# EAGLE board current_source (EAGLE 7.4.0)
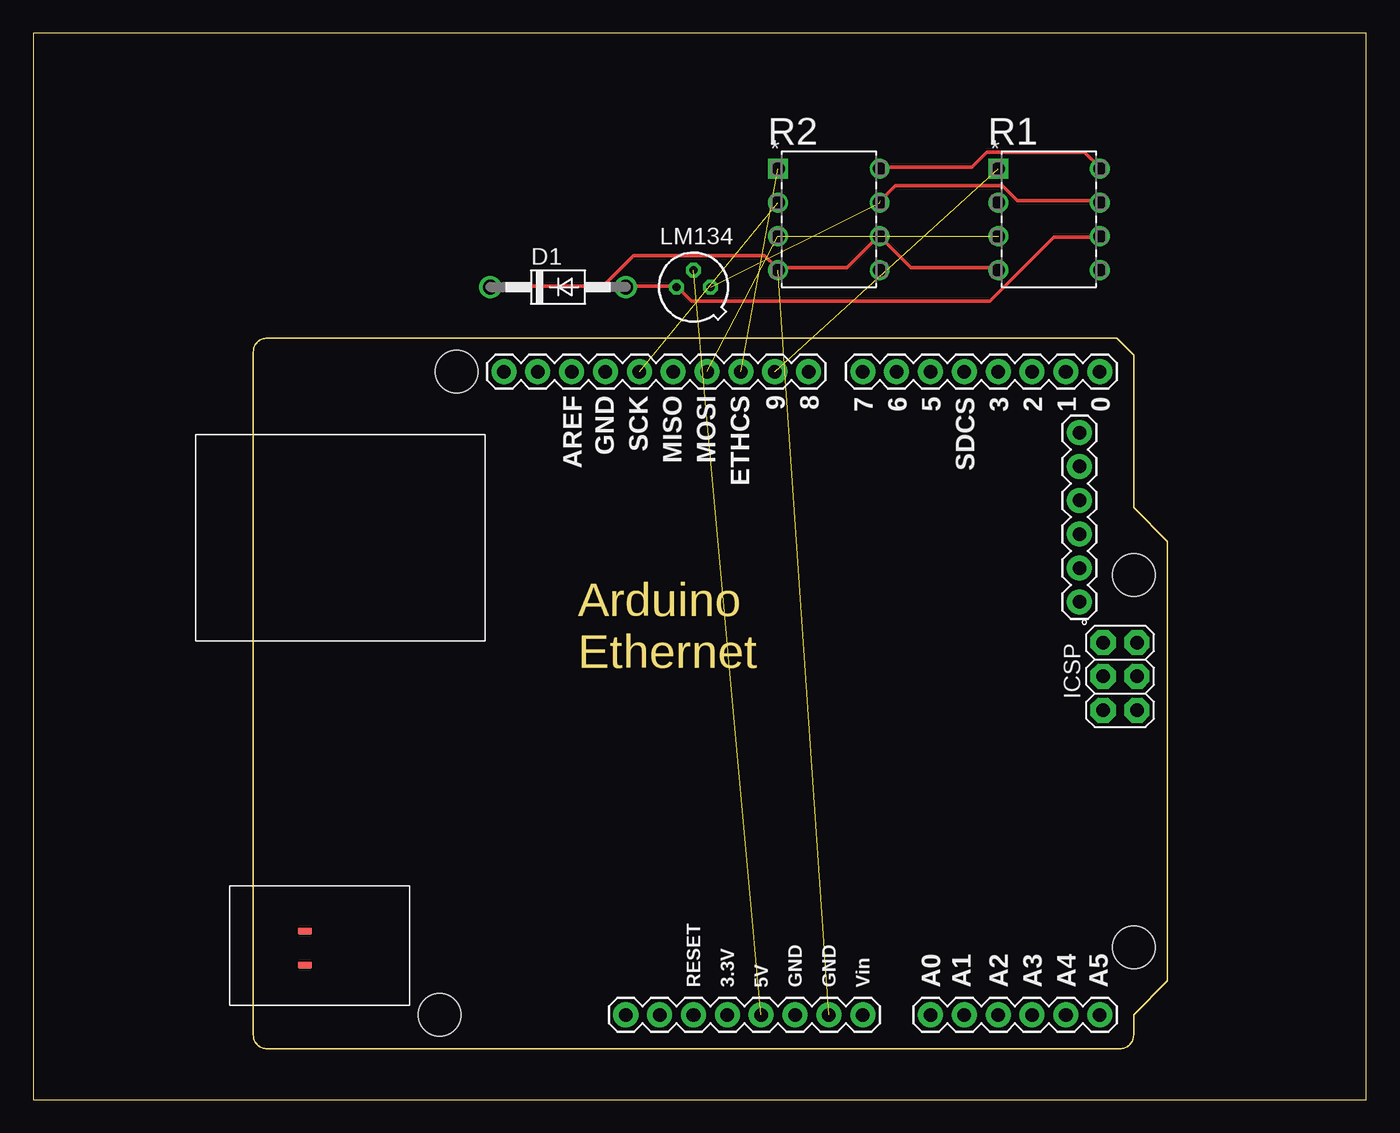
[diagram p0: board, top side]
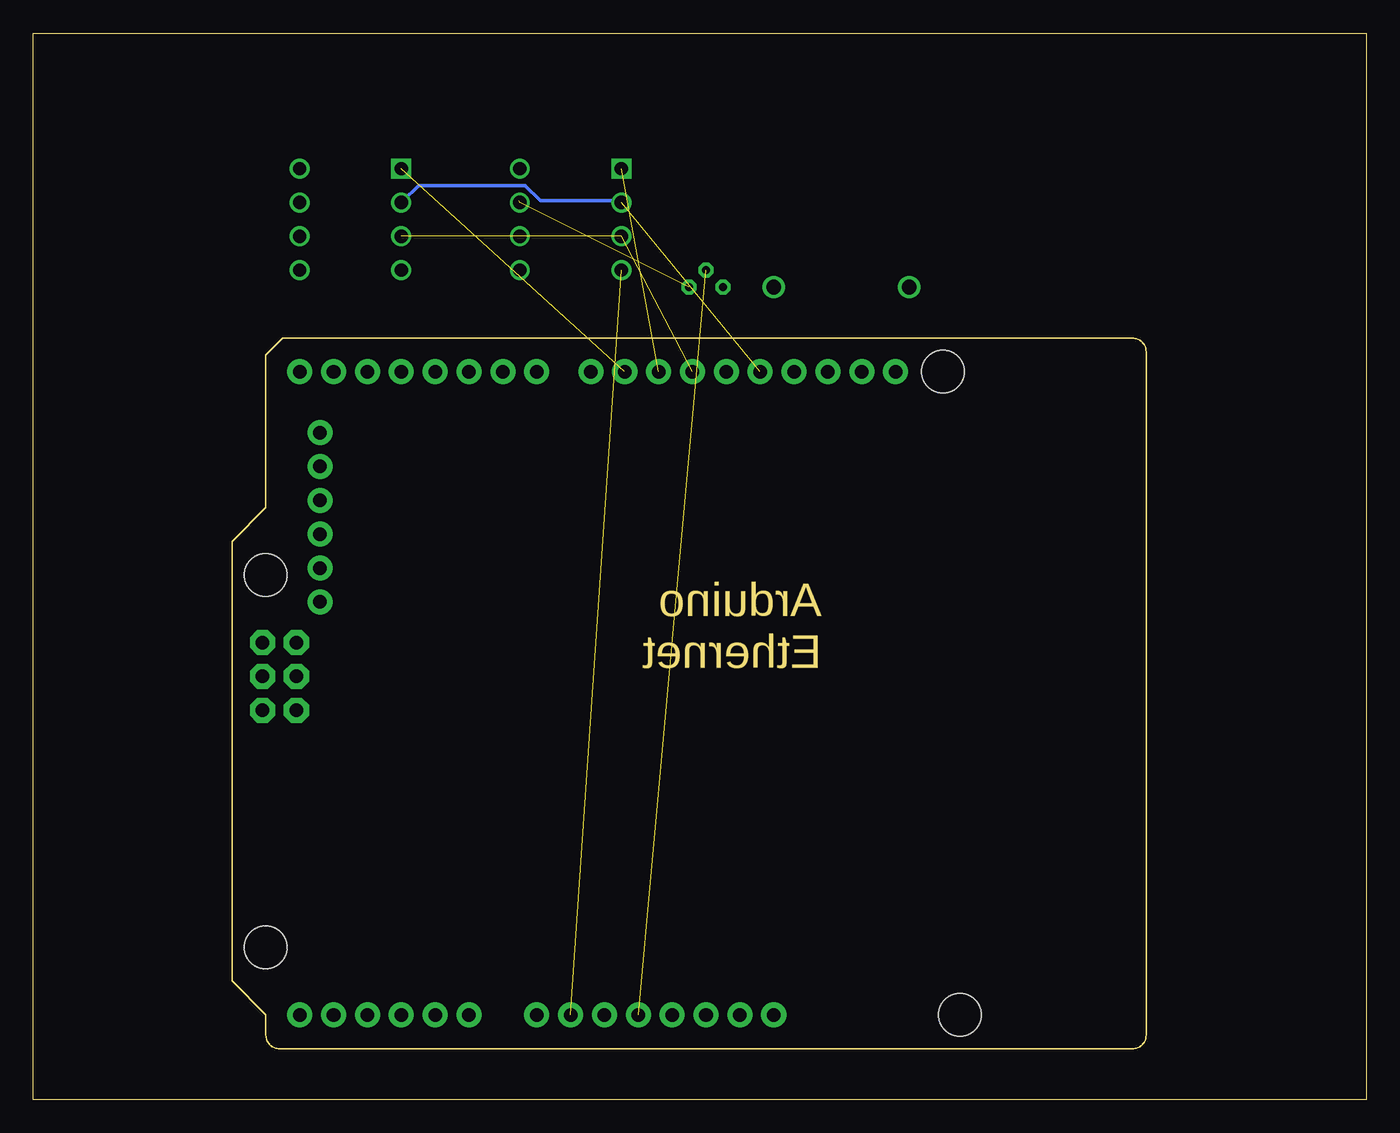
[diagram p1: board, bottom side, seen from below]

Size 100 x 80 mm. Coordinates in mm from the lower left corner, seen from the top.
Outline: 0,0 100,0 100,80 0,80 0,0
Copper layers (1*16): Top 0.035mm / dielectric 1.5mm / Bottom 0.035mm
Design rules "default": minimum track width 10mil, minimum drill 24mil, track to track 8mil, track to pad 8mil, pad to pad 8mil, via to via 8mil, smd to smd 8mil, copper to edge 40mil, drill to drill 8mil, minimum pad ring 10mil, minimum via ring 8mil, stop-mask expansion 4mil, vias tented up to drill 0mil, thermal gap 10mil

## Footprints (pad centres in the part's own frame; a part is rotated, then mirrored left to right if it is on the bottom)
DO41-10 = drill 1.118: A 5.08,0; C -5.08,0
TO46 = drill 0.61 octagon: 1 1.27,0; 2 0,1.27; 3 -1.27,0
ARDUINO_ETHERNET = drill 1.016 pad 1.88: 0 63.5,50.8; 1 60.96,50.8; 2 58.42,50.8; 3 55.88,50.8; 3.3V 35.56,2.54; 4 53.34,50.8; 5 50.8,50.8; 5V 38.1,2.54; 5V. 61.976,41.148; 6 48.26,50.8; 7 45.72,50.8; 8 41.656,50.8; 9 39.116,50.8; (N/C) 27.94,2.54; .GND 61.976,46.228; A0 50.8,2.54; A1 53.34,2.54; A2 55.88,2.54; A3 58.42,2.54; A4 60.96,2.54; A5 63.5,2.54; AREF 23.876,50.8; ETHCS 36.576,50.8; GND 26.416,50.8; GND. 43.18,2.54; GND.. 40.64,2.54; I/OREF 30.48,2.54; MISO 31.496,50.8; MOSI 34.036,50.8; N/C 61.976,43.688; PD0 61.976,38.608; PD1 61.976,36.068; RESET 33.02,2.54; RTS 61.976,33.528; SCK 28.956,50.8; SCL 18.796,50.8; SDA 21.336,50.8; VIN 45.72,2.54 | drill 1.016 pad 1.88 octagon: +5V. 66.294,30.48; GND_ 66.294,25.4; MISO. 63.754,30.48; MOSI. 66.294,27.94; RESET. 63.754,25.4; SCK. 63.754,27.94 | smd 1.016 x 0.508: <PWR>+V 3.861,8.814; <PWR>-V 3.861,6.274 | hole 3.2: 66.04,7.62; 66.04,35.56; 15.24,50.8; 13.97,2.54
DIP254P762X533-8 = drill 0.991 square: 1 -7.62,7.62 | drill 0.991: 2 -7.62,5.08; 3 -7.62,2.54; 4 -7.62,0; 5 0,0; 6 0,2.54; 7 0,5.08; 8 0,7.62

## Placement (x,y rotation side)
D1  1N4933  [DO41-10]  39.37,60.96 0 top
LM134  [TO46]  49.53,60.96 0 top
PCB1  ARDUINO_ETHERNET  [ARDUINO_ETHERNET]  16.51,3.81 0 top
R1  MCP41100  [DIP254P762X533-8]  80.01,62.23 0 top
R2  MCP41100  [DIP254P762X533-8]  63.5,62.23 0 top

## Library data of the parts
D1 = diode
LM134 = linear
PCB1 = E14_Arduino_revB
R1 R2 = Microchip_By_element14_Batch_1; PACKAGE: DIP-8; SUPPLIER: MICROCHIP

## Nets
GND: PCB1.<PWR>-V
I_OUT: D1.C PCB1.GND. R1.4 R2.4 R2.6
N$1: LM134.1 R1.7 R2.7
N$2: D1.A LM134.3 R1.6
N$3: LM134.2 PCB1.5V
N$4: PCB1.ETHCS R2.1
N$5: PCB1.9 R1.1
N$6: PCB1.SCK R1.2 R2.2
N$7: PCB1.MOSI R1.3 R2.3
VCC: PCB1.<PWR>+V
VDD: R1.8 R2.8

## Tracks (layer width: path | path; a pad name or v marks a point on that pad's centre or on a via)
I_OUT  (1 unrouted)
  Top 0.254: R1.4 72.24,62.41 65.84,62.41 63.55,64.69 R2.6 63.32,64.69 61.04,62.41 56.01,62.41 R2.4 55.78,62.41 54.86,63.32 45.03,63.32 42.75,61.04 34.29,61.04 D1.C
N$1  (2 unrouted)
  Top 0.254: 63.55,67.44 64.69,68.58 72.69,68.58 73.84,67.44 80.01,67.44 R1.7
N$2
  Top 0.254: D1.A 44.58,61.04 48.23,61.04 LM134.3 48.46,60.81 49.38,59.89 71.78,59.89 76.58,64.69 80.01,64.69 R1.6
N$3  (1 unrouted)
N$4  (1 unrouted)
N$5  (1 unrouted)
N$6  (1 unrouted)
  Bottom 0.254: R2.2 56.01,67.44 61.95,67.44 63.09,68.58 71.09,68.58 72.24,67.44 R1.2
N$7  (2 unrouted)
VDD
  Top 0.254: R2.8 63.55,69.95 70.41,69.95 71.55,71.09 78.87,71.09 80.01,69.95 R1.8